# Altium PCB PCB.PcbDoc
Units mm, origin at the board's own origin, x right, y up, seen from the top; angles counter-clockwise.
Board outline 39.27 x 25.58 mm, 2 copper layers (Top Layer, Bottom Layer), stack 1.571 mm thick; 16 components, 16 nets, 69 pads, 27 vias.
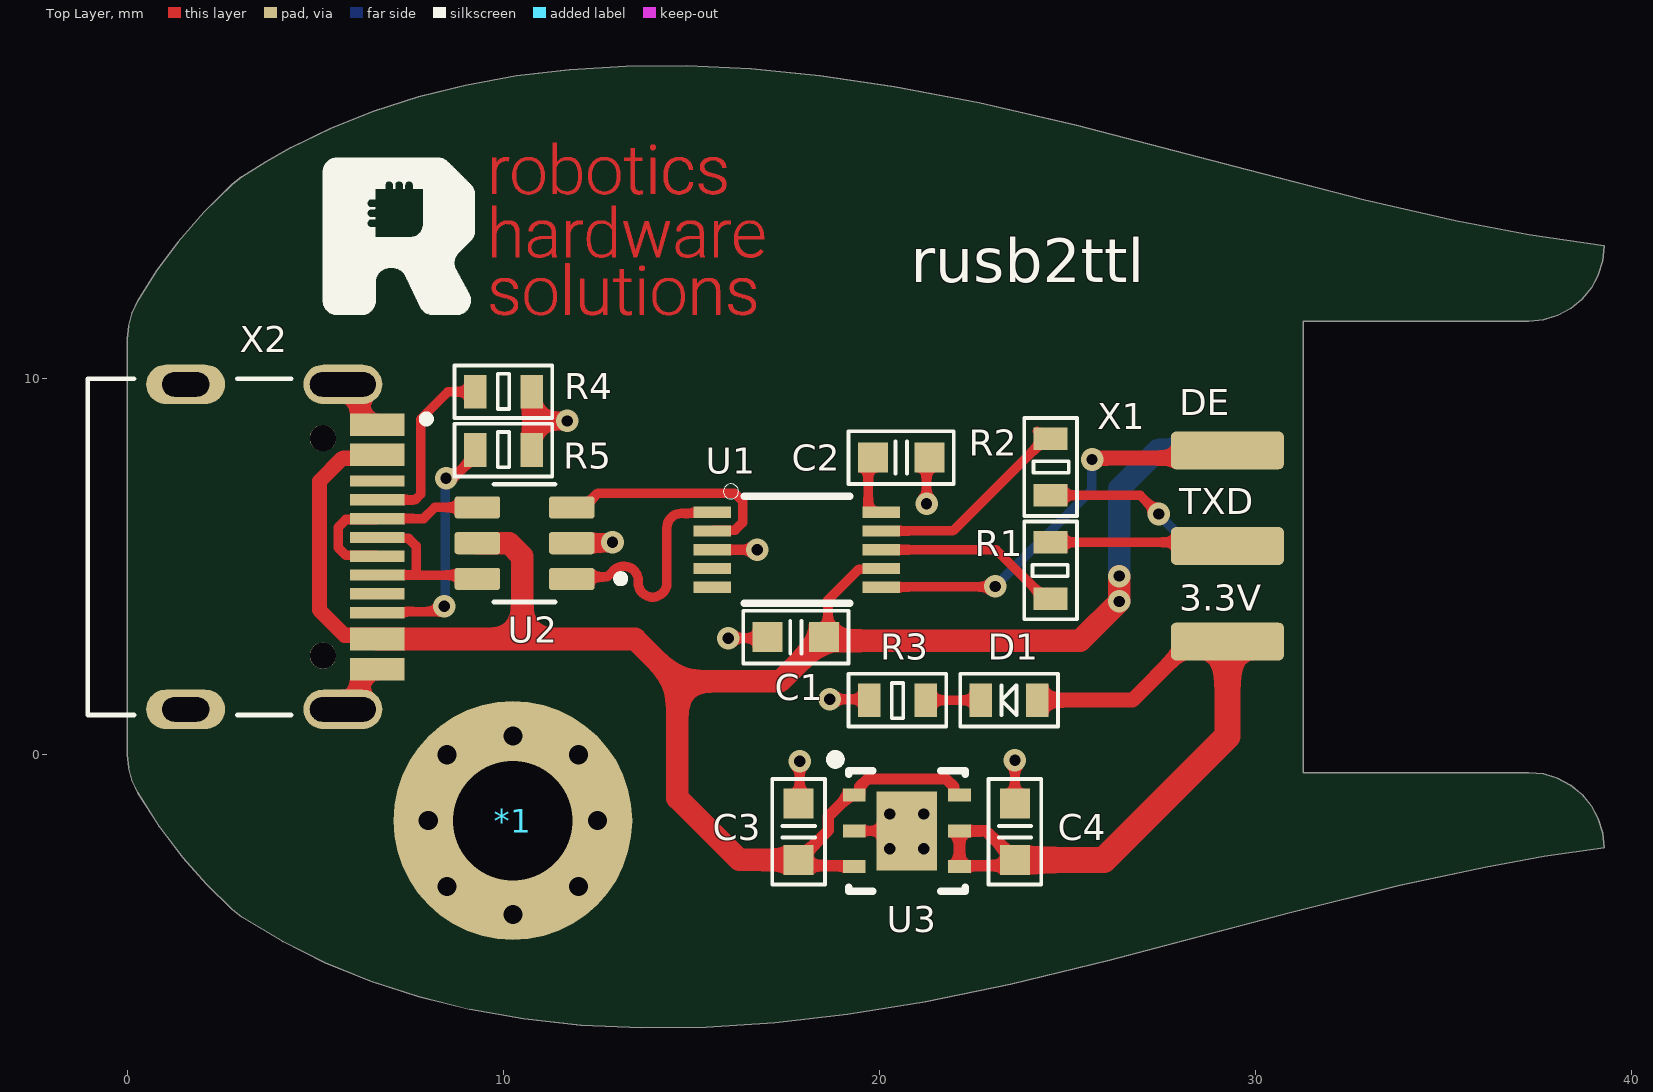
[diagram p0: Top Layer view]
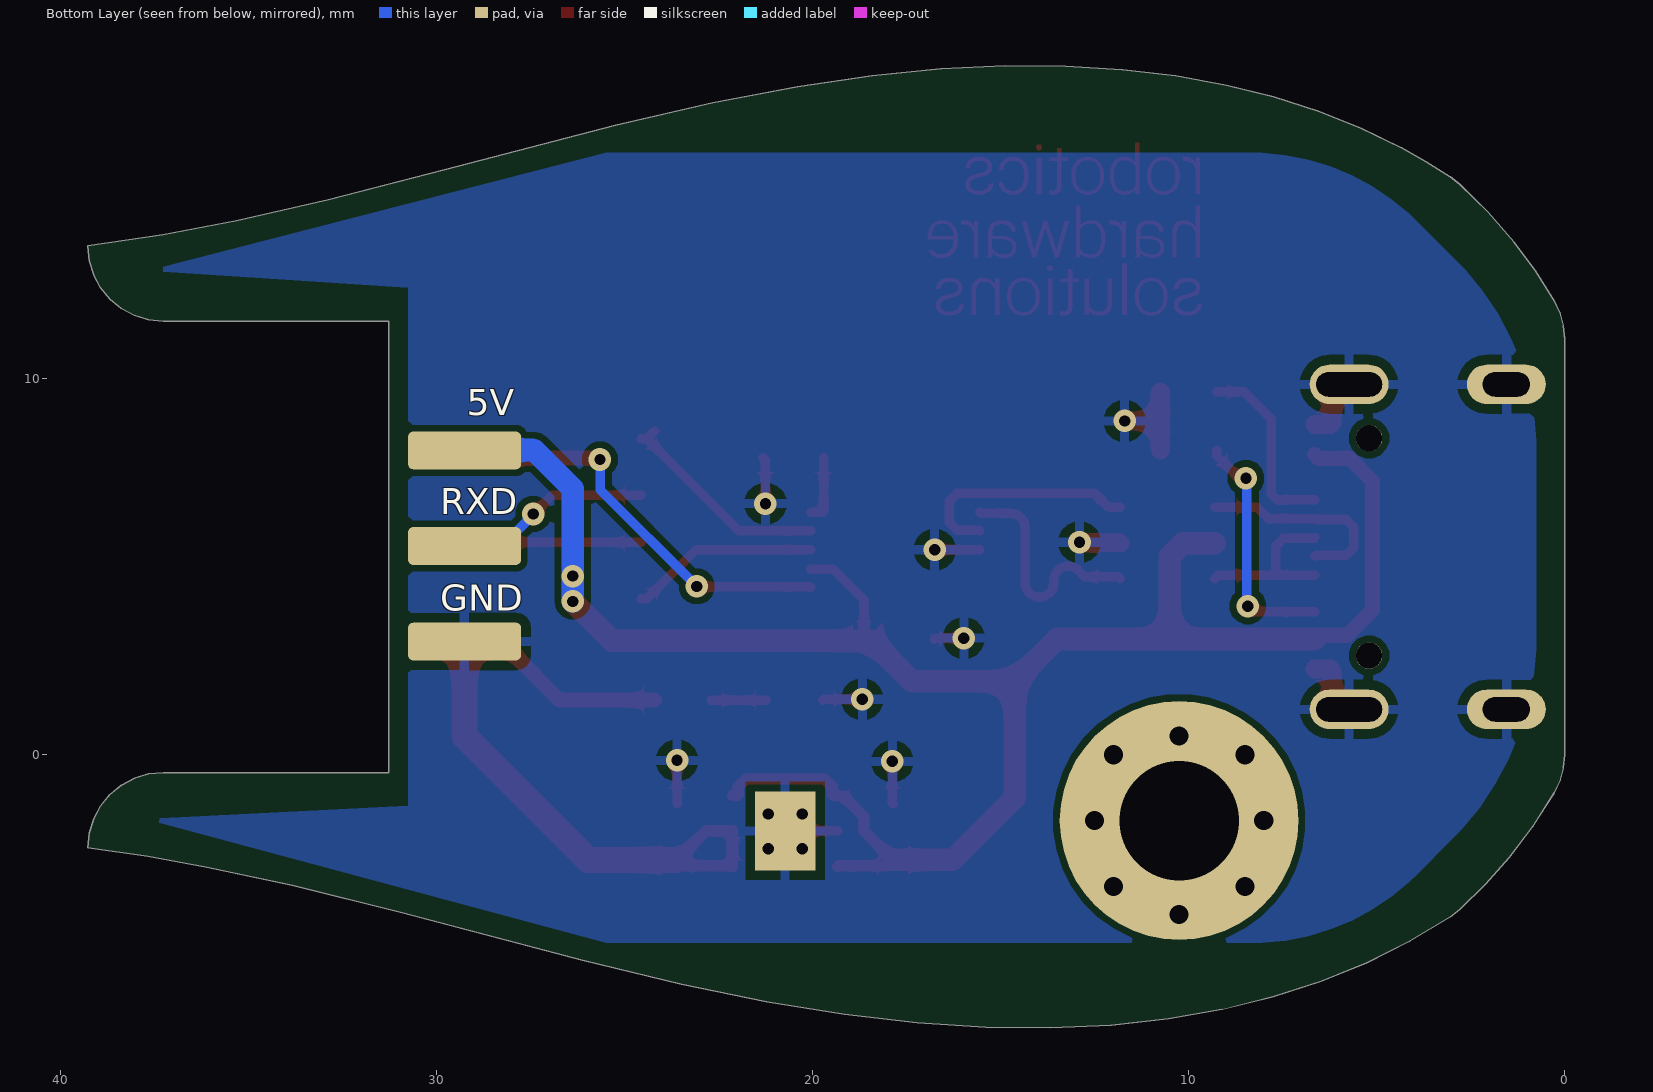
[diagram p1: Bottom Layer view, seen from below]
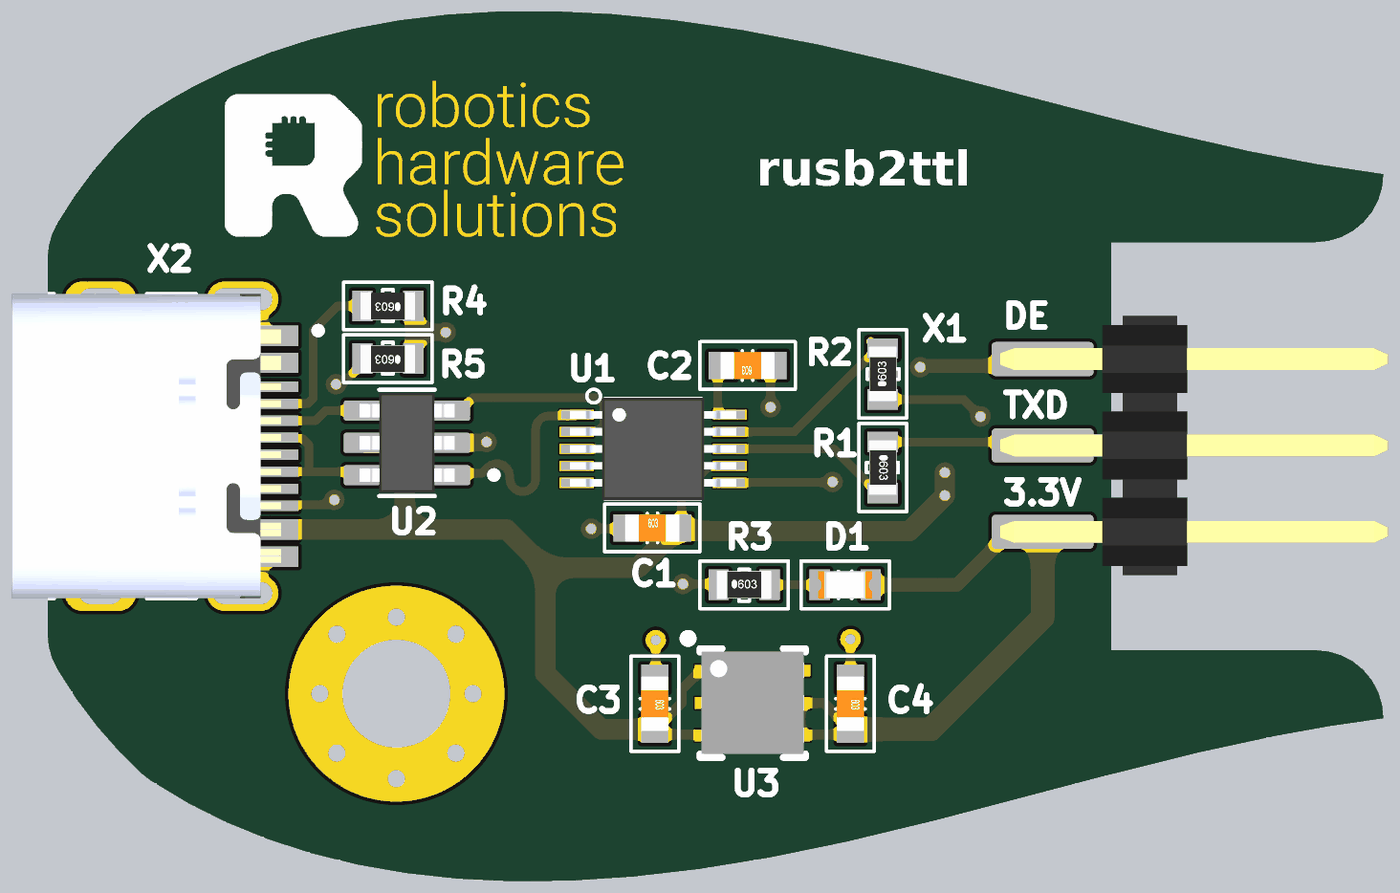
[diagram p2: 3D render of the assembled board from above, using the file's embedded part models]

## Layer stack, top to bottom
Top Solder: solder mask 0.0102, Solder Resist, Dk 3.5
Top Layer: signal copper 0.0356
Dielectric 1: dielectric 1.5, FR-4, Dk 4.8
Bottom Layer: signal copper 0.0356
Bottom Solder: solder mask 0.0102, Solder Resist, Dk 3.5

## Board outline
0.274,-1.011 0.84,-1.896 1.472,-2.73 2.103,-3.444 2.789,-4.116 3.043,-4.313 4.133,-4.967 5.258,-5.529 6.471,-6.024 7.752,-6.439 9.107,-6.774 10.541,-7.025 12.061,-7.19 13.674,-7.266 15.387,-7.247 17.209,-7.128 19.15,-6.903 21.224,-6.566 23.483,-6.101 26.116,-5.467 30.907,-4.206 33.839,-3.475 36.105,-2.987 37.677,-2.703 39.266,-2.473 39.228,-2.083 39.114,-1.708 38.929,-1.362 38.68,-1.059 38.377,-0.81 38.031,-0.625 37.656,-0.512 37.266,-0.473 31.266,-0.473 31.266,11.527 37.266,11.527 37.656,11.565 38.031,11.679 38.377,11.864 38.68,12.113 38.929,12.416 39.114,12.761 39.228,13.137 39.266,13.527 37.279,13.824 35.317,14.2 32.873,14.76 29.785,15.555 25.238,16.74 22.652,17.336 20.398,17.765 18.419,18.053 16.583,18.233 14.87,18.316 13.265,18.309 11.757,18.219 10.338,18.049 9.001,17.805 7.738,17.489 6.545,17.105 5.415,16.653 4.344,16.134 3.687,15.767 3.043,15.367 2.789,15.17 2.037,14.427 1.35,13.633 0.785,12.87 0.274,12.064 0.123,11.745 0.031,11.405 0,11.054 0,0 0.031,-0.351 0.123,-0.692

## Design rules (kind name [scope] priority, off if disabled: settings)
Clearance [All] p1: gap=0.18 ignorepadtopadclearanceinfootprint=FALSE
DiffPairsRouting [All] p1: maxlimit=0.254 minlimit=0.254 mostfreqgap=0.254 toplayer_minwidth=0.254 toplayer_maxwidth=0.381 toplayer_prefwidth=0.381 bottomlayer_minwidth=0.254 bottomlayer_maxwidth=0.381 bottomlayer_prefwidth=0.381 maxuncoupledlength=12.7
PolygonConnect [All] p1: connectstyle=Relief reliefconductorwidth=0.254 reliefentries=4 polygonreliefangle="90 Angle" airgapwidth=0.254
RoutingVias [All] p1: holewidth=0.3 width=0.6 viastyle="Through Hole" minholewidth=0.3 minwidth=0.6 maxholewidth=2 maxwidth=4
SolderMaskExpansion [All] p1: expansion=0.102 istentingtop=FALSE
Width [All] p1: maxlimit=2 minlimit=0.254 preferedwidth=0.254
29 further rules are at their usual default settings.

## Classes and differential pairs
component class power: *1 C3 C4 R4 R5 U2 U3 X2
component class ttl: C1 C2 D1 R1 R2 R3 U1 X1
differential pair USB_CONN_D: +USB_CONN_D_P -USB_CONN_D_N

## Components (designator, comment, footprint, x,y, rotation, side; value= is the part's Value field where it differs from the comment)
*1 "M3" M3 10.25,-1.75 r0 top
C1 "0.1uF" C_0603 17.775,3.125 r0 top
C2 "0.1uF" C_0603 20.575,7.9 r180 top
C3 "4.7uF" C_0603 17.85,-2.048 r270 top
C4 "1uF" C_0603 23.6,-2.048 r270 top
D1 "RED" LED_0603 23.445,1.45 r180 top
R1 "22" R_0603 24.55,4.9 r270 top
R2 "22" R_0603 24.55,7.65 r90 top
R3 "700" R_0603 20.475,1.45 r0 top
R4 "5.1k" R_0603 10,9.65 r180 top
R5 "5.1k" R_0603 10,8.1 r180 top
U1 "CH340E" MSOP10 17.8,5.45 r0 top
U2 "USBLC6-2SC6" SOT95P280X145-6N 10.562,5.625 r180 top
U3 "LP38692-3.3V" WSON-6 20.725,-2.025 r0 top
X1 "PLD2-6" PLD-6-sideways 29.625,3.01 r90 top net-tie
X2 "TYPE-C-31-M-12" HRO_TYPE-C-31-M-12 1.55,5.527 r270 top

## Footprints (in the part's own frame and the unit in brackets; to place one, negate y for a bottom-side part, rotate by r counter-clockwise, add the part's x,y. Pads: shape width x height; smd on the part's side, far side on the other; paste and mask are expansions set on the pad)
C_0603 [mm] "Chip Capacitor; Body 1.6 x 0.8 mm (LxW typ)"
  rect 0.8x0.8 smd: 1(-0.75,0) 2(0.75,0)
  silkscreen extent -1.4,-0.7 1.4,0.7, body extent -0.8,-0.4 0.8,0.4, height 0.3
HRO_TYPE-C-31-M-12 [mm]
  rect 0.6x1.45 smd: A1B12(-3.25,5.095) A4B9(-2.45,5.095) B1A12(3.25,5.095) B4A9(2.45,5.095)
  rect 0.3x1.45 smd: A5(-1.25,5.095) A6(-0.25,5.095) A7(0.25,5.095) A8(1.25,5.095) B5(1.75,5.095) B6(0.75,5.095) B7(-0.75,5.095) B8(-1.75,5.095)
  oval 1.05x2.1 hole 0.65 slot 1.75 at 90 deg: S1(-4.32,4.18) S2(4.32,4.18)
  oval 1.05x2.1 hole 0.65 slot 1.25 at 90 deg: S3(-4.32,0) S4(4.32,0)
  round 0.7 hole 0.7 unplated: ""(-2.89,3.65) ""(2.89,3.65)
  silkscreen extent -4.47,-2.6 4.47,6.5, body extent -4.47,-2.6 4.47,5.31, height 3.31
LED_0603 [mm]
  rect 0.6x0.9 smd: 1(-0.75,0) 2(0.75,0)
  silkscreen extent -1.3,-0.7 1.3,0.7, body extent -0.8,-0.4 0.8,0.4, height 0.55
M3 [mm]
  round 6.35 hole 3.175: 1(0,0)
MSOP10 [mm]
  rect 1x0.3 smd paste-1 mask+0.05: 1(-2.25,1) 2(-2.25,0.5) 3(-2.25,0) 4(-2.25,-0.5) 5(-2.25,-1) 6(2.25,-1) 7(2.25,-0.5) 8(2.25,0) 9(2.25,0.5) 10(2.25,1)
  silkscreen extent -1.95,-1.43 1.4,1.75, body extent -2.45,-1.5 2.45,1.5, height 1
PLD-6-sideways [mm] "Connector; Header; 3x2 Position"
  rrect25% 1x3 smd: 1(0,0.375) 3(2.54,0.375) 5(5.08,0.375)
  rrect25% 1x3 smd far side: 2(0,0.375) 4(2.54,0.375) 6(5.08,0.375)
  body extent -1.27,-9.78 6.35,1.62, height 1.75
R_0603 [mm]
  rect 0.6x0.9 smd: 1(-0.75,0) 2(0.75,0)
  silkscreen extent -1.3,-0.7 1.3,0.7, body extent -0.8,-0.41 0.8,0.41, height 0.45
SOT95P280X145-6N [mm]
  rrect25% 1.21x0.59 smd: 1(-1.255,0.95) 2(-1.255,0) 3(-1.255,-0.95) 4(1.255,-0.95) 5(1.255,0) 6(1.255,0.95)
  silkscreen extent -2.66,-1.57 0.81,1.57, body extent -1.4,-1.46 1.4,1.46, height 1.42
WSON-6 [mm] "TI wson"
  rect 0.6x0.35 smd paste-0.175 mask+0.051: 1(-1.4,0.95) 2(-1.4,0) 3(-1.4,-0.95) 4(1.4,-0.95) 5(1.4,0) 6(1.4,0.95)
  rect 1.6x2.1 smd paste-0.8 mask+0.051: 7(0,0)
  rect 1.6x2.1 smd far side paste-0.8 mask+0.051: 7(0,0)
  silkscreen extent -2.02,-1.6 1.55,2.02, body extent -1.51,-1.49 1.51,1.51, height 0.75

## Part data
C1 C2: library part CAP_SMD, "Capacitor", Part Number=CC0603KPX7R9BB104
C3: library part CAP_SMD, "Capacitor", Part Number=CC0603KRX5R6BB475
C4: library part CAP_SMD, "Capacitor", Part Number=CC0603ZRY5V7BB105
D1: library part LED_SMT_0603, "LED", Part Number=GNL-0603SRC, Color=RED
R1 R2: library part RES_SMD, "Resistor", Part Number=RC0603FR-0722RL
R3: library part RES_SMD, "Resistor", Part Number=RC0603FR-07750RL
R4 R5: library part RES_SMD, "Resistor", Part Number=RC0603FR-075K1L
U1: "USB to serial chip CH340", Package=Package, Check_prices=https://www.snapeda.com/parts/CH340E/WCH/view-part/?ref=eda, MF=WCH, Part Number=CH340E, SnapEDA_Link=https://www.snapeda.com/parts/CH340E/WCH/view-part/?ref=snap
U2: "17V Clamp 5A (8/20Âµs) Ipp Tvs Diode Surface Mount SOT-23-6", Package="SOT-23-6 STMicroelectronics", Availability="In Stock", Check_prices=https://www.snapeda.com/parts/USBLC6-2SC6/STMicroelectronics/view-part/?ref=eda, MF=STMicroelectronics, MP=USBLC6-2SC6, Part Number=USBLC6-2SC6, Price=None, Purchase-URL=https://pricing.snapeda.com/search/part/USBLC6-2SC6/?ref=eda, SnapEDA_Link=https://www.snapeda.com/parts/USBLC6-2SC6/STMicroelectronics/view-part/?ref=snap
U3: library part LP38692, "LP38690, LP38692 1-A LDO CMOS Linear Regulators  Stable with Ceramic Output Capacitors"
X1: "Header, 6-Pin, Dual row"
X2: "USB Connectors 24 Receptacle 1 8.94*7.3mm RoHS", Package=None, Availability=Unavailable, MP=TYPE-C-31-M-12, Part Number=TYPE-C-31-M-12, Price=None

## Via types
v1: diameter 0.6, hole 0.3, Top Layer to Bottom Layer, tented both sides, 13 vias
v2: diameter 0.889, hole 0.508, Top Layer to Bottom Layer, tented both sides, 8 vias
v3: diameter 0.6, hole 0.3, Top Layer to Bottom Layer, 6 vias

## Nets (pads, with @x,y where several pads share a name; then routed paths per layer and width w, separated by ;. In a path a pad name is that pad's centre, name@x,y a point inside that pad or via, vN(x,y) a via of type N, cw(c..) or ccw(c..) an arc to the next point about the centre after c; other vN are vias at no path point)
DE: U1.6 X1.5 | length 11.2
  Top Layer w0.254: U1.6 20.063,4.463 23.063,4.463 v1(23.075,4.475)
  Top Layer w0.4: v1(25.65,7.85) 25.688,7.888 29.048,7.888 X1.5
  Bottom Layer w0.254: v1(23.075,4.475) 25.642,7.042 25.642,7.842 v1(25.65,7.85)
GND: C1.1 C2.1 C3.1 C4.1 R3.1 R4.1 R5.1 U1.3 U2.2 U3.2 U3.7 X1.2 X2.A1B12 X2.B1A12 X2.S1 X2.S2 X2.S3 X2.S4 | length 14.9
  Top Layer w0.254: U1.3 v1(16.75,5.45) ; v1(15.975,3.1) 16.752,3.1 16.764,3.088 C1.1@16.764,3.075 ; C3.1 17.875,-1.273 v3(17.875,-0.175) ; v1(18.675,1.475) 19.7,1.475 R3.1 ; U3.2 U3.7@20.725,-2.025 ; v1(21.25,6.675) 21.25,7.825 C2.1 ; C4.1 v3(23.6,-0.15)
  Top Layer w0.5: X2.S2 5.933,1.207 6.188,1.461 6.188,2.227 6.238,2.277 X2.B1A12 ; X2.S1@6.218,9.797 6.188,9.766 6.188,8.827 6.238,8.777 X2.A1B12 ; R5.1 10.75,8.875 ; R4.1 10.75,8.875 ; v1(11.7,8.875) 10.75,8.875 ; U2.2 11.829,5.637 12.888,5.637 v1(12.9,5.65)
  other v3: 20.275,-2.5 21.175,-2.5 20.275,-1.575 21.175,-1.575
NetD1_2: D1.2 R3.2 | length 1.5
  Top Layer w0.254: R3.2 D1.2
NetR1_1: R1.1 X1.3 | length 4.7
  Top Layer w0.254: R1.1 29.15,5.65 X1.3
NetR2_1: R2.1 X1.4 | length 5.3
  Top Layer w0.254: R2.1 26.925,6.9 v1(27.425,6.4)
  Bottom Layer w0.254: v1(27.425,6.4) 27.425,6.375 27.949,5.851 28.949,5.851 X1.4
NetR4_2: R4.2 X2.A5 | length 5
  Top Layer w0.254: X2.A5 7.651,6.777 7.8,6.926 7.8,8.925 8.525,9.65 R4.2
NetR5_2: R5.2 X2.B5 | length 6.4
  Top Layer w0.254: X2.B5@6.645,3.807 8.188,3.807 8.331,3.95 v1(8.425,3.95) ; v1(8.475,7.35) 8.541,7.416 8.716,7.416 9.25,7.95 R5.2
  Bottom Layer w0.254: v1(8.425,3.95) 8.45,3.975 8.45,7.325 v1(8.475,7.35)
RXD: R2.2 U1.9 | length 5.8
  Top Layer w0.254: U1.9 21.95,5.95 R2.2@24.4,8.4 ; R2.2@24.195,8.605 R2.2@24.4,8.4 ; R2.2 R2.2@24.4,8.4
TXD: R1.2 U1.8 | length 5
  Top Layer w0.254: U1.8 23.1,5.45 24.4,4.15 R1.2
USB_CONN_D+: U2.6 X2.A6 X2.B6 | length 4.6
  Top Layer w0.254: X2.B6 7.675,4.777 ; X2.A6 6.668,5.754 7.477,5.754 7.677,5.554 7.677,4.779 7.675,4.777 ; U2.6 9.205,4.777 7.675,4.777
USB_CONN_D-: U2.4 X2.A7 X2.B7 | length 5.6
  Top Layer w0.254: X2.A7 6.622,5.3 5.813,5.3 5.613,5.5 5.613,6.054 5.813,6.254 6.622,6.254 X2.B7 7.875,6.277 8.173,6.575 U2.4
USB_CONN_D_N: U1.2 U2.3 | length 6.3
  Top Layer w0.254: U2.3 12.127,6.575 12.295,6.743 12.295,6.745 12.508,6.958 16.144,6.958 16.357,6.745 16.357,6.173 16.157,5.973 15.573,5.973 U1.2
USB_CONN_D_P: U1.1 U2.1 | length 6.3
  Top Layer w0.254: U2.1 11.869,4.727 12.314,4.727 12.76,4.727 12.934,4.901 cw(c13.203,4.632) 13.584,4.632 13.584,4.571 ccw(c13.965,4.571) 14.346,4.571 14.346,6.036 cw(c14.727,6.036) 14.727,6.417 15.276,6.417 15.517,6.417 U1.1
VCC3.3V: C4.2 D1.1 U3.4 U3.5 X1.1 | length 19.5
  Top Layer w0.3: U3.4 22.15,-2.95 23.448,-2.95 C4.2 22.827,-2.025 U3.5 U3.4
  Top Layer w0.4: D1.1 26.725,1.45 27.95,2.675 27.95,2.71 28.25,3.01 X1.1
  Top Layer w0.7: C4.2 25.962,-2.798 29.25,0.49 X1.1
VCC3.3VCH: C2.2 U1.10 | length 1.8
  Top Layer w0.254: C2.2@19.7,7.9 19.7,6.473 19.723,6.45 U1.10
VCC5VUSB: C1.2 C3.2 U1.7 U2.5 U3.1 U3.3 U3.6 X1.6 X2.A4B9 X2.B4A9 | length 55.7
  Top Layer w0.254: C1.2@18.63,3.03 18.63,4.114 19.443,4.927 20.027,4.927 U1.7
  Top Layer w0.3: U3.3 19.3,-2.95 18.002,-2.95 C3.2 18.638,-2.01 18.638,-1.637 19.175,-1.1 19.3,-1.1 U3.1 19.45,-1.075 19.475,-1.05 19.475,-0.851 19.681,-0.645 21.769,-0.645 21.975,-0.851 21.975,-1.05 22,-1.075 U3.6
  Top Layer w0.4: X2.B4A9 6.545,3.177 5.773,3.177 5.106,3.844 5.106,7.273 5.71,7.877 6.545,7.877 X2.A4B9
  Top Layer w0.6: X2.B4A9 13.498,3.077 14.625,1.95 ; U2.5 10.149,5.625 10.5,5.274 10.5,3.077 ; C3.2 16.273,-2.798 14.625,-1.15 14.625,1.95 ; C1.2@18.425,3.025 17.35,1.95 14.625,1.95 ; C1.2@18.63,3.03 25.33,3.03 v1(26.375,4.075) v1(26.375,4.75)
  Bottom Layer w0.6: v1(26.375,4.075) v1(26.375,4.75) 26.375,7.075 27.4,8.1 29.24,8.1 X1.6
pads on no net: *1.1 U1.4 U1.5 X2. X2.A8 X2.B8
copper on no net:
  other v2: 10.25,-4.25 8.5,-3.5 12,-3.5 8,-1.75 12.5,-1.75 8.5,0 12,0 10.25,0.5

## Polygon pours and split planes (outlines as drawn)
GND on Bottom Layer "NONET_L-01_P-001" (solid, pour order 0): 2.884,13.134 3.917,14.167 cw(c8.342,9.742) 8.342,16 25.5,16 37.656,12.87 30.75,12.416 30.75,10.75 30.75,0.25 30.75,-1.362 37.766,-1.708 25.5,-5 8.334,-5 cw(c8.334,1.239) 3.923,-3.173 3.013,-2.263 cw(c8.476,3.2) 0.75,3.2 0.75,7.982 cw(c8.036,7.982)

## Other copper
Top Layer:
  drawing of 27 lines, arcs and shapes, not listed

## Silkscreen, mask and mechanical layers (free items; w line width, h text height)
Top Overlay:
  region: 883 vertices and 1 holes, not listed, extent 5.197,11.694 9.242,15.874
  text "rusb2ttl" at 20.825,12.182 h2
  text "DE" at 27.975,9.025 h0.7
  text "TXD" at 27.975,6.4 h0.7
  text "3.3V" at 27.975,3.825 h0.7
Bottom Overlay:
  text "5V" at 29.192,9.025 h0.7
  text "RXD" at 29.892,6.4 h0.7
  text "GND" at 29.892,3.825 h0.7
Top Solder:
  drawing of 27 lines, arcs and shapes, not listed
Board:
  the board outline again, w0.254

## Dimensions
-1.05,9.997 to 39.3,13.5 on Dimensions
31.266,11.527 to 31.266,-0.473 on Dimensions
0,0 to 0,11.054 on Dimensions